# EAGLE board arduino1 (EAGLE 9.6.2)

Size 17.78 x 48.26 mm. Coordinates in mm from the lower left corner, seen from the top.
Copper layers (1*16): Top 0.035mm / dielectric 1.5mm / Bottom 0.035mm
Design rules "default": minimum track width 6mil, minimum drill 0.35mm, track to track 6mil, track to pad 6mil, pad to pad 6mil, via to via 6mil, smd to smd 6mil, copper to edge 40mil, drill to drill 6mil, minimum pad ring 10mil, minimum via ring 8mil, stop-mask expansion 4mil, vias tented up to drill 0mil, thermal gap 10mil

## Footprints (pad centres in the part's own frame; a part is rotated, then mirrored left to right if it is on the bottom)
S02P = drill 1.016 long: 1 1.25,0; 2 -1.25,0
S05P = drill 1.016 long: 1 5,0; 2 2.5,0; 3 0,0; 4 -2.5,0; 5 -5,0
S03P = drill 1.016 long: 1 2.5,0; 2 0,0; 3 -2.5,0
ARDUINO-MICRO = drill 0.9: 3V3 16.51,3.81; 5V 16.51,29.21; A0 16.51,8.89; A1 16.51,11.43; A2 16.51,13.97; A3 16.51,16.51; A4 16.51,19.05; A5 16.51,21.59; D2 1.27,26.67; D3 1.27,24.13; D4 1.27,21.59; D5 1.27,19.05; D6 1.27,16.51; D7 1.27,13.97; D8 1.27,11.43; D9 1.27,8.89; D10 1.27,6.35; D11 1.27,3.81; D12 1.27,1.27; D13 16.51,1.27; GND 1.27,29.21; GND1 16.51,34.29; MISO 16.51,39.37; MOSI 1.27,41.91; NC7 16.51,26.67; NC8 16.51,24.13; REF 16.51,6.35; RST 1.27,31.75; RST1 16.51,31.75; RX 1.27,34.29; SCK 16.51,41.91; SS 1.27,39.37; TX 1.27,36.83; VIN 16.51,36.83 | hole 1.2: 1.27,-1.27; 16.51,-1.27; 1.27,44.45; 16.51,44.45

## Placement (x,y rotation side)
CON_1  [S02P]  49.53,50.8 0 top  (outside the outline)
CON_2  [S05P]  -2.54,-60.96 0 top  (outside the outline)
CON_3  [S02P]  -5.08,-71.12 0 top  (outside the outline)
MOT1  [S03P]  -3.81,-81.28 0 top  (outside the outline)
MOT2  [S03P]  6.35,-20.32 0 top  (outside the outline)
U$3  ARDUINO_MICROFOOTPRINT  [ARDUINO-MICRO]  0,2.54 0 top

## Library data of the parts
CON_1-CON_3 MOT1 MOT2 = con-amp-mt; OC_FARNELL: unknown; OC_NEWARK: unknown
U$3 = arduino-micro

## Nets
GND: CON_3.2 U$3.GND1
HV: CON_3.1 U$3.VIN
LV: U$3.3V3
N$2: CON_2.1
N$3: U$3.D3
N$4: U$3.D2
N$5: CON_1.1 MOT1.3 MOT2.3
N$6: CON_1.2 MOT1.2 MOT2.2
N$10: MOT2.1 U$3.D11
N$11: CON_2.2
N$12: MOT1.1 U$3.D12
N$13: CON_2.5 U$3.D7
N$14: CON_2.4
N$16: CON_2.3

## Tracks (layer width: path | path; a pad name or v marks a point on that pad's centre or on a via)
GND  (1 unrouted)
HV  (1 unrouted)
N$5  (2 unrouted)
N$6  (2 unrouted)
N$10  (1 unrouted)
N$12  (1 unrouted)
N$13  (1 unrouted)